# Altium PCB atmega16pcb.PcbDoc
Units mil, origin at the board's own origin, x right, y up, seen from the top; angles counter-clockwise.
Board outline 3170 x 1735 mil, 2 copper layers (Top Layer, Bottom Layer); 23 components, 40 nets, 117 pads, 0 vias.
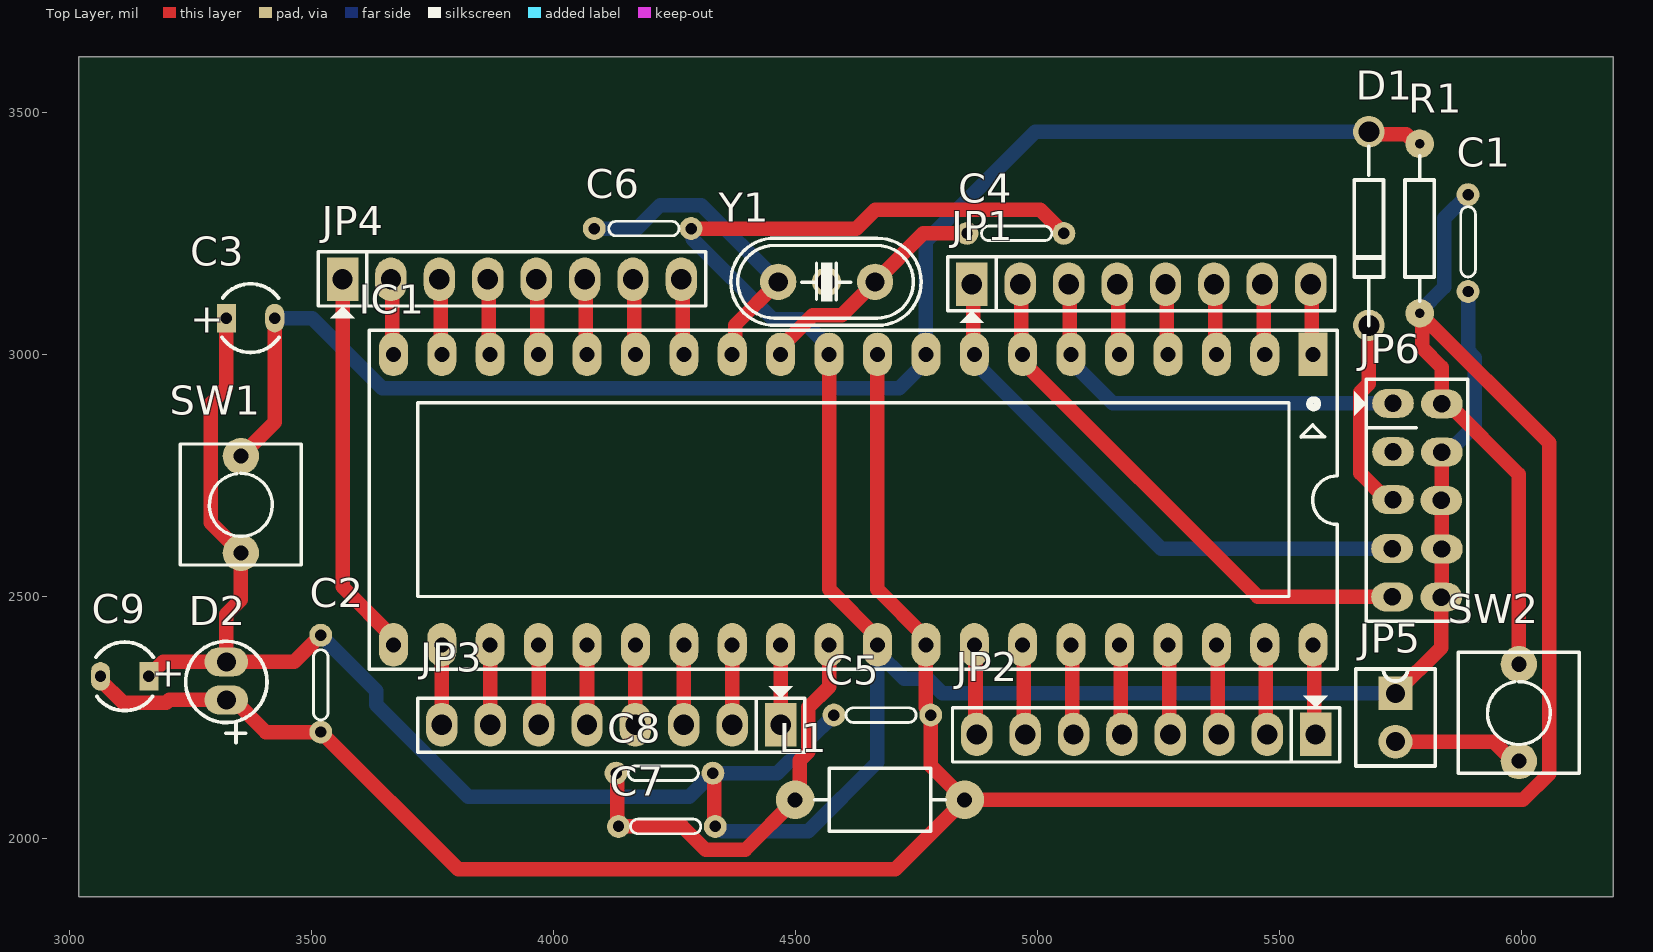
[diagram p0: Top Layer view]
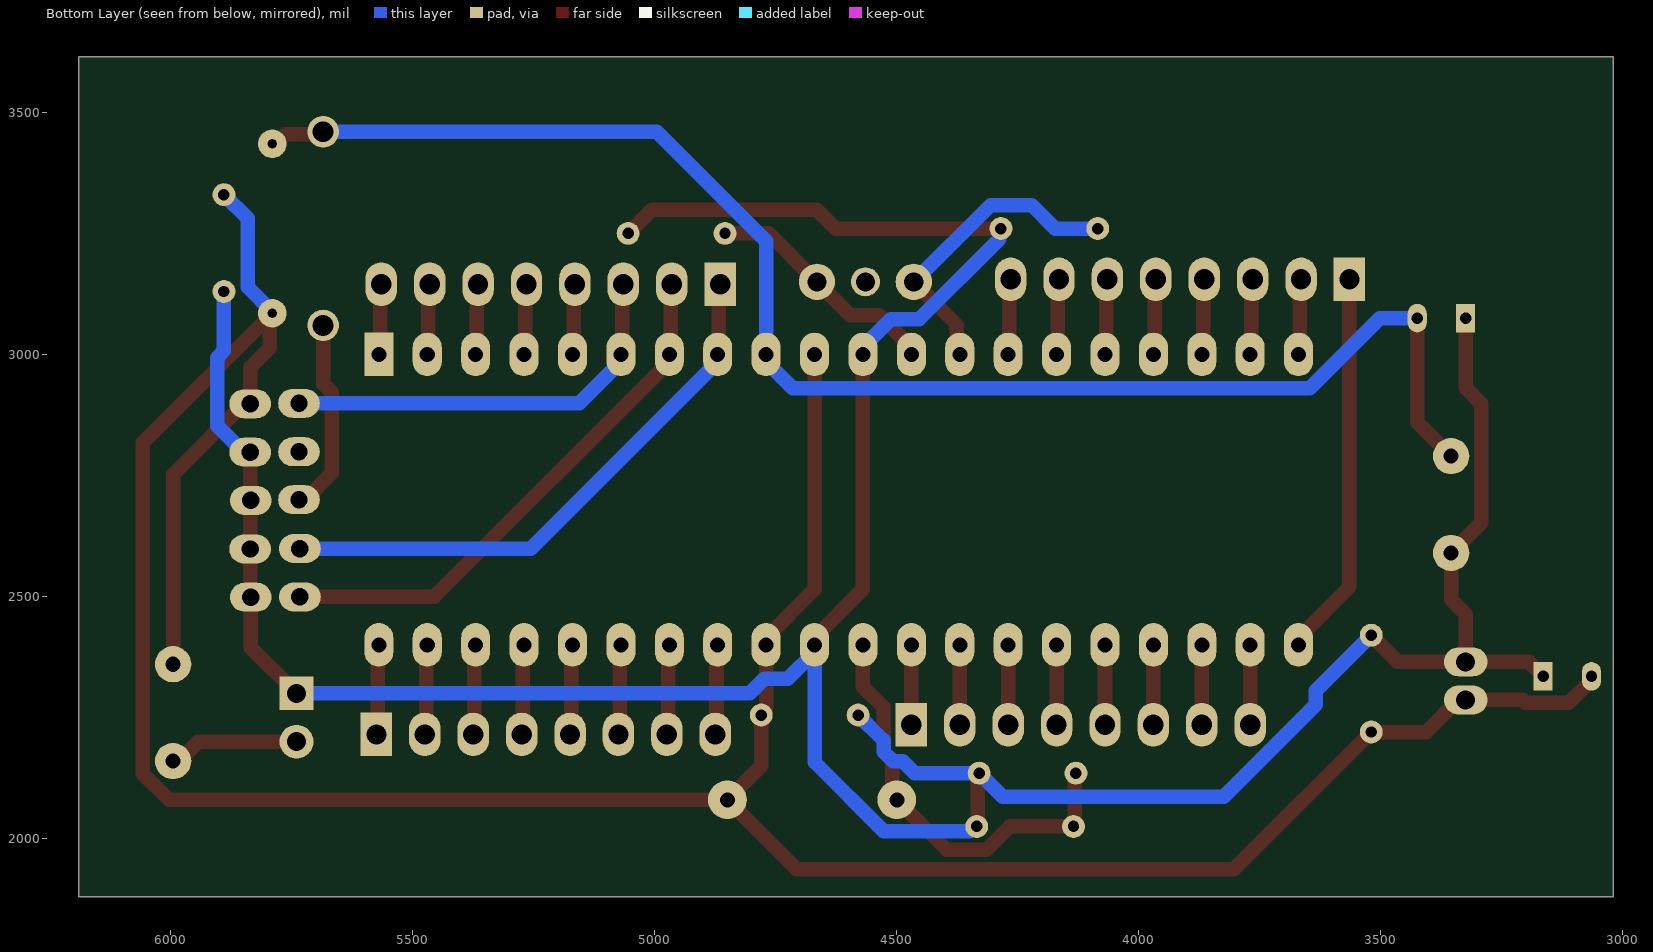
[diagram p1: Bottom Layer view, seen from below]
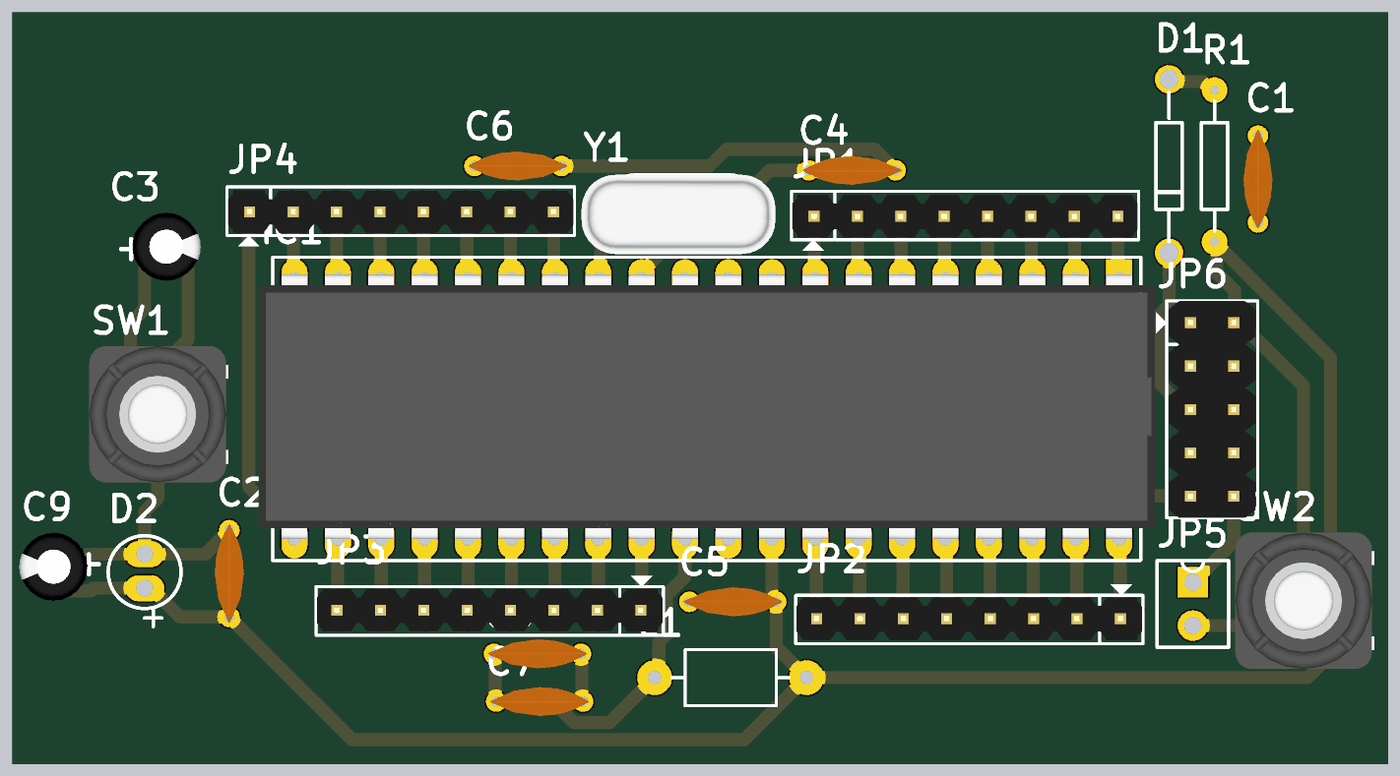
[diagram p2: 3D render of the assembled board from above, using the file's embedded part models]

## Layer stack, top to bottom
Top Solder: solder mask 0.4, Solder Resist, Dk 3.5
Top Layer: signal copper 1.4
Dielectric 1: dielectric 12.6, FR-4, Dk 4.8
Bottom Layer: signal copper 1.4
Bottom Solder: solder mask 0.4, Solder Resist, Dk 3.5

## Board outline
3020,1880 6190,1880 6190,3615 3020,3615

## Design rules (kind name [scope] priority, off if disabled: settings)
Clearance [All] p1: gap=10 ignorepadtopadclearanceinfootprint=FALSE
PolygonConnect [All] p1: connectstyle=Relief reliefconductorwidth=10 reliefentries=4 polygonreliefangle="90 Angle" airgapwidth=10
RoutingVias [All] p1: holewidth=28 width=35 viastyle="Through Hole" minholewidth=28 minwidth=35 maxholewidth=28 maxwidth=35
SolderMaskExpansion [All] p1: expansion=4 istentingtop=FALSE
SupplyNets "Schematic Supply Nets_1" [InNet('GND')] p1: voltage=0.000
SupplyNets "Schematic Supply Nets" [InNet('VCC')] p2: voltage=0.000
Width [All] p1: maxlimit=40 minlimit=20 preferedwidth=30
30 further rules are at their usual default settings.

## Classes and differential pairs
component class atmega16a: C2 C4 C5 C6 C7 C8 C9 D1 JP1 JP2 JP3 JP4 JP5 JP6 L1 R1 S1 SW1 SW2

## Components (designator, comment, footprint, x,y, rotation, side; value= is the part's Value field where it differs from the comment)
C1 "Capacitor Ceramic" Tu-ceramic 5890,3330 r270 top value=10u
C2 "Capacitor Ceramic" Tu-ceramic 3520,2220 r90 top value=0.1u
C3 "Cap" C3MM 3375,3075 r0 top value=1uF
C4 "Capacitor Ceramic" Tu-ceramic 5055,3250 r180 top value=22p
C5 "Capacitor Ceramic" Tu-ceramic 4580,2255 r0 top value=0.1up
C6 "Capacitor Ceramic" Tu-ceramic 4285,3260 r180 top value=22p
C7 "Capacitor Ceramic" Tu-ceramic 4135,2025 r0 top value=10u
C8 "Capacitor Ceramic" Tu-ceramic 4130,2135 r0 top value=0.1u
C9 "Cap" C3MM 3115,2335 r180 top value=10uF
D1 "DIODE" diode 5685,3260 r270 top
D2 "LED" CAP10UF 3325,2365 r270 top
IC1 "ATMEGA16" DIP40/W0.6 5570,3000 r180 top value="Atmega 16L"
JP1 "JP8 PIN" JP8 4865,3145 r0 top value=JP7
JP2 "JP8 PIN" JP8 5575,2215 r180 top value=JP7
JP3 "JP8 PIN" JP8 4470,2235 r180 top value=JP7
JP4 "JP8 PIN" JP8 3565,3155 r0 top value=JP7
JP5 "JP2" CON2 5740,2300 r0 top value="Connector 2"
JP6 "ISP PROGRAM" JP5X2 5734.5,2898.5 r270 top value="Connector 5x2"
L1 "Ferrite Bead" L/0.4 4500,2080 r0 top value="150 mH"
R1 "1k" R1/6W 5790,3260 r270 top value="R1/4W - 1K"
SW1 "SW" SW2 3355,2590 r90 top value="SW chip 2 pin"
SW2 "SW" SW2 5995,2160 r90 top value="SW chip 2 pin"
Y1 "8MHz" XT2 4565,3150 r0 top

## Footprints (in the part's own frame and the unit in brackets; to place one, negate y for a bottom-side part, rotate by r counter-clockwise, add the part's x,y. Pads: shape width x height; smd on the part's side, far side on the other; paste and mask are expansions set on the pad)
C3MM [mm]
  rect 1x1.5 hole 0.6: 1(-1.27,0)
  oval 1x1.5 hole 0.6: 2(1.27,0)
  silkscreen extent -1.5,-1.81 1.5,1.8, body extent -2,-2.03 1.99,1.97, height 7.01
CAP10UF [mil]
  oval 60x90 hole 39.37 unplated: 1(78.74,0) 2(0,0)
  silkscreen extent -42,-84 167,84
CON2 [mil]
  rect 70x70 hole 39.37 unplated: 1(0,0)
  round 70 hole 39.37 unplated: 2(0,-100)
  silkscreen extent -82,-150 82,50
diode [mil] "Diode"
  round 65 hole 43.31: 1(-200,0) 2(200,0)
  silkscreen extent -170,-30 200,30
DIP40/W0.6 [mil] "40 PIN, W 600mil, Pin to pin 100mil"
  rect 60x90 hole 31: 1(0,0)
  oval 60x90 hole 31: 2(100,0) 3(200,0) 4(300,0) 5(400,0) 6(500,0) 7(600,0) 8(700,0) 9(800,0) 10(900,0) 11(1000,0) 12(1100,0) 13(1200,0) 14(1300,0) 15(1400,0) 16(1500,0) 17(1600,0) 18(1700,0) 19(1800,0) 20(1900,0) 21(1900,600) 22(1800,600) 23(1700,600) 24(1600,600) 25(1500,600) 26(1400,600) 27(1300,600) 28(1200,600) 29(1100,600) 30(1000,600) 31(900,600) 32(800,600) 33(700,600) 34(600,600) 35(500,600) 36(400,600) 37(300,600) 38(200,600) 39(100,600) 40(0,600)
  silkscreen extent -50,-50 1950,650, body extent -82,-10 1982,600, height 224
JP5X2 [mil]
  oval 60x86 hole 36: 1(-0.5,0.5) 2(99.5,0.5) 3(198.5,0.5) 4(299.5,-1.5) 5(399.5,-1.5) 6(0.5,101.5) 7(100.5,101.5) 8(200,100) 9(300.5,101.5) 10(400,100)
  silkscreen extent -51,-80 450,155, body extent -50,-50 450,150, height 366
JP8 [mil] "JP8"
  rect 65x90 hole 42: 1(0,0)
  oval 65x90 hole 42: 2(100,0) 3(200,0) 4(300,0) 5(400,0) 6(500,0) 7(600,0) 8(700,0)
  silkscreen extent -50,-80 750,57, body extent -48,-50 748,48, height 354
L/0.4 [mil] "Inductor , 2 Pin, L 350mil, W 150 mil"
  round 80 hole 31: 1(0,0) 2(350,0)
  silkscreen extent 40,-65 310,65
R1/6W [mm]
  round 1.5 hole 0.5: 1(-4.445,0) 2(4.445,0)
  silkscreen extent -3.81,-0.76 3.81,0.76
SW2 [mil] "SW button 2pin, 250x 250 mil"
  round 75 hole 31: 1(0,0) 2(200,0)
  silkscreen extent -25,-125 225,125, body extent -60,-163 255,157, height 257
Tu-ceramic [mm] "Tu gom mini"
  round 1.2 hole 0.6: 1(0,0) 2(5.08,0)
  silkscreen extent 0.64,-0.38 4.32,0.38, body extent -0.38,-0.85 5.46,0.85, height 6.12
XT2 [mm] "Footpin for Crystal 2 pin"
  round 1.524 hole 1: 0(0,0)
  round 1.905 hole 1: 1(-2.54,0) 2(2.54,0)
  silkscreen extent -5.03,-2.29 4.96,2.29, body extent -5.93,-2.36 5.42,2.29, height 3.5

## Part data
C1 C2 C4 C5 C6 C7 C8: library part CapDecop, "Capacitor", LatestRevisionDate=17-Jul-2002, LatestRevisionNote="Re-released for DXP Platform.", PackageReference=RAD-0.3, Published=8-Jun-2000, Publisher="Altium Limited"
C3 C9: library part Cap_1, "Capacitor", LatestRevisionDate=17-Jul-2002, LatestRevisionNote="Re-released for DXP Platform.", PackageReference=RAD-0.3, Published=8-Jun-2000, Publisher="Altium Limited"
D1: "Diode"
IC1: library part Atmega16L, "8-Bit AVR Microcontroller with 16K Bytes of In-System Programmable Flash Memory"
JP1 JP2 JP3 JP4: library part JP8
JP5: library part CON2, "Connector 2"
JP6: library part JP5x2, "Connector 5x2"
L1: library part L1, "Inductor"
R1: library part Res, "Resistor 1/4W"
SW1 SW2: library part SW2, "Switch button 2 pin"
Y1: library part Crystal, "Crystal Oscillator", LatestRevisionDate=17-Jul-2002, LatestRevisionNote="Re-released for DXP Platform.", PackageReference=R38, Published=8-Jun-2000, Publisher="Altium Limited"

## Nets (pads, with @x,y where several pads share a name; then routed paths per layer and width w, separated by ;. In a path a pad name is that pad's centre, name@x,y a point inside that pad or via, vN(x,y) a via of type N, cw(c..) or ccw(c..) an arc to the next point about the centre after c; other vN are vias at no path point)
GND: C1.2 C2.2 C3.1 C4.1 C5.1 C6.1 C7.2 C8.2 C9.1 D2.2 IC1.11 IC1.31 JP5.1 JP6.7 JP6.8 JP6.9 JP6.10 SW1.1 | length 7092.9
  Top Layer w30: C9.1 3165,2344.84 3169.69,2349.53 3179.53,2349.53 3195,2365 D2.2 ; C3.1 3325,2930.88 3292.5,2898.38 3292.5,2652.5 SW1.1 3355,2493.34 3325,2463.34 D2.2 ; C2.2 3465,2365 D2.2 ; C6.1 4626.38,3260 4665,3298.62 5006.38,3298.62 C4.1 ; C8.2 4332.5,2132.5 4332.5,2027.5 C7.2 ; IC1.11@4570,3006.88 IC1.11 4570,2515 4670,2415 IC1.31 ; JP5.1 5834.5,2394.5 JP6.10 5835.25,2499.25 5835.25,2597.25 JP6.9 5835.25,2598.75 5835.25,2697.75 JP6.8 5835.25,2699.25 5835.25,2797.25 JP6.7
  Bottom Layer w30: C2.2 3634.74,2305.26 3634.74,2276.44 3824.81,2086.38 4281.38,2086.38 C8.2 4463.08,2135 4487.59,2159.51 4507.37,2159.51 4527.5,2179.64 4527.5,2202.5 C5.1 ; C6.1 4288.3,3256.7 4288.3,3238.31 4454.19,3072.43 4512.57,3072.43 4570,3015 IC1.11 ; C7.2 4339.67,2025 4349.67,2015 4526.92,2015 4670,2158.08 IC1.31@4670,2385 ; IC1.31 IC1.31@4670,2385 ; JP5.1 4803.76,2300 4773.76,2330 4725,2330 IC1.31@4670,2385 ; JP6.7 5849,2798 5904,2853 5904,2993.28 5890,3007.28 C1.2
NetC3_2: C3.2 D1.1 IC1.9 R1.1 SW1.2 | length 3114.7
  Top Layer w30: SW1.2 3425,2860 C3.2 ; D1.1 5690.36,3454.64 5762.5,3454.64 5782.14,3435 R1.1
  Bottom Layer w30: C3.2 3502.22,3075 3647.22,2930 4715,2930 4770,2985 IC1.9 4770,3233.76 4996.24,3460 D1.1
NetC4_2: C4.2 IC1.12 Y1.2 | length 497.3
  Top Layer w30: IC1.12 4470,3015 4536.06,3081.06 4596.06,3081.06 Y1.2 4765,3250 C4.2
NetC6_2: C6.2 IC1.13 Y1.1 | length 655.2
  Top Layer w30: IC1.13 4375.74,3005.74 4375.74,3060.74 Y1.1
  Bottom Layer w30: C6.2 4173.09,3260 4221.71,3308.62 4306.38,3308.62 Y1.1
NetC7_1: C7.1 C8.1 IC1.30 L1.1 | length 889.1
  Top Layer w30: C8.1 4132.5,2132.5 4132.5,2027.5 C7.1 4266.24,2025 4314.86,1976.38 4396.38,1976.38 L1.1 4509.57,2089.57 4509.57,2161.71 4527.5,2179.64 4527.5,2271.26 4570,2313.76 IC1.30
NetIC1_1: IC1.1 JP1.8 | length 147.1
  Top Layer w30: JP1.8 5567.5,3142.5 5567.5,3002.5 IC1.1
NetIC1_2: IC1.2 JP1.7 | length 147.1
  Top Layer w30: JP1.7 5467.5,3142.5 5467.5,3002.5 IC1.2
NetIC1_3: IC1.3 JP1.6 | length 147.1
  Top Layer w30: JP1.6 5367.5,3142.5 5367.5,3002.5 IC1.3
NetIC1_4: IC1.4 JP1.5 | length 147.1
  Top Layer w30: JP1.5 5267.5,3142.5 5267.5,3002.5 IC1.4
NetIC1_5: IC1.5 JP1.4 | length 147.1
  Top Layer w30: JP1.4 5167.5,3142.5 5167.5,3002.5 IC1.5
NetIC1_14: IC1.14 JP4.8 | length 157.1
  Top Layer w30: JP4.8 4267.5,3152.5 4267.5,3002.5 IC1.14
NetIC1_15: IC1.15 JP4.7 | length 157.1
  Top Layer w30: JP4.7 4167.5,3152.5 4167.5,3002.5 IC1.15
NetIC1_16: IC1.16 JP4.6 | length 157.1
  Top Layer w30: JP4.6 4067.5,3152.5 4067.5,3002.5 IC1.16
NetIC1_17: IC1.17 JP4.5 | length 157.1
  Top Layer w30: JP4.5 3967.5,3152.5 3967.5,3002.5 IC1.17
NetIC1_18: IC1.18 JP4.4 | length 157.1
  Top Layer w30: JP4.4 3867.5,3152.5 3867.5,3002.5 IC1.18
NetIC1_19: IC1.19 JP4.3 | length 157.1
  Top Layer w30: JP4.3 3767.5,3152.5 3767.5,3002.5 IC1.19
NetIC1_20: IC1.20 JP4.2 | length 157.1
  Top Layer w30: JP4.2 3667.5,3152.5 3667.5,3002.5 IC1.20
NetIC1_21: IC1.21 JP4.1 | length 798.5
  Top Layer w30: JP4.1 3565,2520 3670,2415 IC1.21
NetIC1_22: IC1.22 JP3.8 | length 165
  Top Layer w30: JP3.8 IC1.22
NetIC1_23: IC1.23 JP3.7 | length 165
  Top Layer w30: JP3.7 IC1.23
NetIC1_28: IC1.28 JP3.2 | length 165
  Top Layer w30: JP3.2 IC1.28
NetIC1_29: IC1.29 JP3.1 | length 165
  Top Layer w30: JP3.1 IC1.29
NetIC1_33: IC1.33 JP2.8 | length 187.1
  Top Layer w30: IC1.33 4872.5,2397.5 4872.5,2217.5 JP2.8
NetIC1_34: IC1.34 JP2.7 | length 187.1
  Top Layer w30: IC1.34 4972.5,2397.5 4972.5,2217.5 JP2.7
NetIC1_35: IC1.35 JP2.6 | length 187.1
  Top Layer w30: IC1.35 5072.5,2397.5 5072.5,2217.5 JP2.6
NetIC1_36: IC1.36 JP2.5 | length 187.1
  Top Layer w30: IC1.36 5172.5,2397.5 5172.5,2217.5 JP2.5
NetIC1_37: IC1.37 JP2.4 | length 187.1
  Top Layer w30: IC1.37 5272.5,2397.5 5272.5,2217.5 JP2.4
NetIC1_38: IC1.38 JP2.3 | length 187.1
  Top Layer w30: IC1.38 5372.5,2397.5 5372.5,2217.5 JP2.3
NetIC1_39: IC1.39 JP2.2 | length 187.1
  Top Layer w30: IC1.39 5472.5,2397.5 5472.5,2217.5 JP2.2
NetIC1_40: IC1.40 JP2.1 | length 187.1
  Top Layer w30: IC1.40 5572.5,2397.5 5572.5,2217.5 JP2.1
NetJP5_2: JP5.2 SW2.1 | length 271.6
  Top Layer w30: JP5.2 5942.82,2200 5982.82,2160 SW2.1
"PB5 MOSI": IC1.6 JP1.3 JP6.1 | length 862.7
  Top Layer w30: JP1.3 5067.5,3142.5 5067.5,3002.5 IC1.6
  Bottom Layer w30: IC1.6 5070,2985 5156,2899 JP6.1
"PB6 MISO": IC1.7 JP1.2 JP6.5 | length 1126.4
  Top Layer w30: JP1.2 4967.5,3142.5 4967.5,3002.5 IC1.7 4970,2985 5456,2499 JP6.5
"PB7 SCK": IC1.8 JP1.1 JP6.4 | length 1185
  Top Layer w30: JP1.1 4867.5,3142.5 4867.5,3002.5 IC1.8
  Bottom Layer w30: IC1.8 4870,2985 5256,2599 JP6.4
"PC2 TCK": IC1.24 JP3.6 | length 165
  Top Layer w30: JP3.6 IC1.24
"PC3 TMS": IC1.25 JP3.5 | length 165
  Top Layer w30: JP3.5 IC1.25
"PC4 TDO": IC1.26 JP3.4 | length 165
  Top Layer w30: JP3.4 IC1.26
"PC5 TDI": IC1.27 JP3.3 | length 165
  Top Layer w30: JP3.3 IC1.27
"RST ISP": D1.2 JP6.3 | length 403.2
  Top Layer w30: D1.2 5685,2939.78 5667,2921.78 5667,2755 5722,2700 JP6.3
VCC: C1.1 C2.1 C5.2 C9.2 D2.1 IC1.10 IC1.32 JP6.6 L1.2 R1.2 SW2.2 | length 6401.2
  Top Layer w30: C9.2 3065,2327.27 3111.79,2280.47 3201.29,2280.47 3207.08,2286.26 D2.1 3340,2286.26 3406.26,2220 C2.1 3803.62,1936.38 4706.38,1936.38 L1.2 ; IC1.10 4670,2515 4770,2415 IC1.32 4770,2269.67 4780,2259.67 C5.2 4780,2150 L1.2 ; R1.2 R1.2@5795.56,3079.44 ; SW2.2 5995,2752 5849,2898 JP6.6 5836,2973 5795.56,3013.44 R1.2@5795.56,3079.44 ; L1.2 6003.39,2080 6057.5,2134.11 6057.5,2817.5 R1.2@5795.56,3079.44
  Bottom Layer w30: R1.2 5790,3088.14 5841.13,3139.27 5841.13,3281.13 C1.1
pads on no net: JP6.2 Y1.0

## Text inside footprints (layer, text, board x,y; h text height)
C3: Top Overlay "+" at 3250,3045 h60
C9: Top Overlay "+" at 3240,2365 h60 r180